# EAGLE board reciever_new (EAGLE 9.6.2)
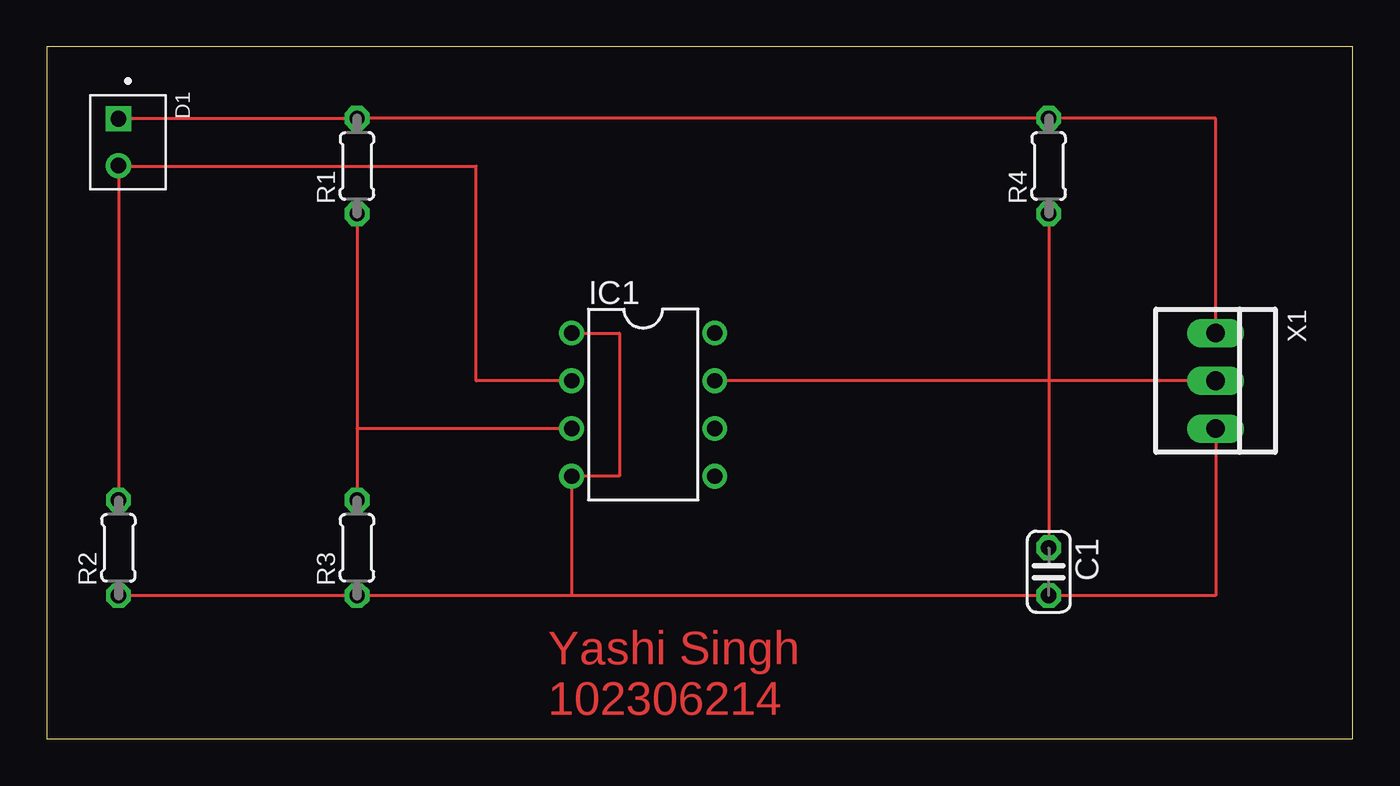
[diagram p0: board, top side]
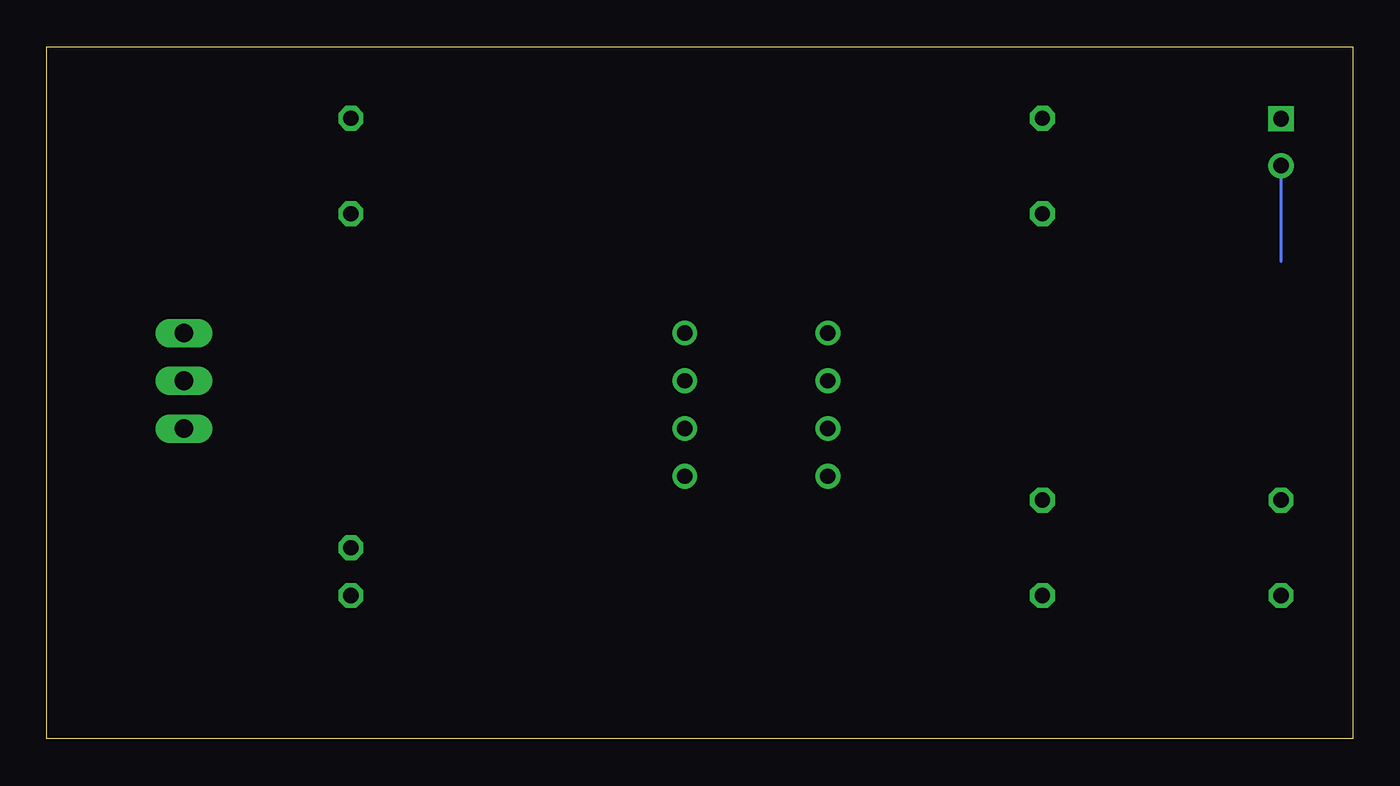
[diagram p1: board, bottom side, seen from below]

Size 69.52 x 36.82 mm. Coordinates in mm from the lower left corner, seen from the top.
Outline: 0,0 69.52,0 69.52,36.82 0,36.82 0,0
Copper layers (1*16): Top 0.035mm / dielectric 1.5mm / Bottom 0.035mm
Design rules "default": minimum track width 6mil, minimum drill 0.35mm, track to track 6mil, track to pad 6mil, pad to pad 6mil, via to via 6mil, smd to smd 6mil, copper to edge 40mil, drill to drill 6mil, minimum pad ring 10mil, minimum via ring 8mil, stop-mask expansion 4mil, vias tented up to drill 0mil, thermal gap 10mil

## Footprints (pad centres in the part's own frame; a part is rotated, then mirrored left to right if it is on the bottom)
C025-024X044 = drill 0.813 octagon: 1 -1.27,0; 2 1.27,0
DIO_BPW41N = drill 0.83 pad 1.25: A 1.25,0 | drill 0.83 pad 1.25 square: C -1.25,0
DIL08 = drill 0.813 pad 1.27: 1 -3.81,-3.81; 2 -1.27,-3.81; 3 1.27,-3.81; 4 3.81,-3.81; 5 3.81,3.81; 6 1.27,3.81; 7 -1.27,3.81; 8 -3.81,3.81
0204/5 = drill 0.813 octagon: 1 -2.54,0; 2 2.54,0
22-23-2031 = drill 1 long: 1 -2.54,0; 2 0,0; 3 2.54,0

## Placement (x,y rotation side)
C1  [C025-024X044]  53.34,8.89 270 top
D1  BPW41N  [DIO_BPW41N]  3.81,31.75 270 top
IC1  LM311N  [DIL08]  31.75,17.78 270 top
R1  100k  [0204/5]  16.51,30.48 90 top
R2  120K  [0204/5]  3.81,10.16 90 top
R3  22k  [0204/5]  16.51,10.16 90 top
R4  1k  [0204/5]  53.34,30.48 90 top
X1  22-23-2031  [22-23-2031]  62.23,19.05 270 top

## Library data of the parts
C1 = rcl; SPICEPREFIX: C
D1 = BPW41N; AVAILABILITY: In Stock; DESCRIPTION: Photodiode 940nm 130° Radial, Side View; MF: Vishay Semiconductor Opto Division; MP: BPW41N; PACKAGE: None; PRICE: None; PURCHASE-URL: https://pricing.snapeda.com/search/part/BPW41N/?ref=eda
IC1 = linear
R1-R4 = rcl; SPICEPREFIX: R
X1 = con-molex; MF: MOLEX; MPN: 22-23-2031; OC_FARNELL: 1462950; OC_NEWARK: 30C0862

## Nets
N$1: D1.A IC1.2 R2.2
N$3: C1.1 IC1.7 R4.1 X1.2
N$4: D1.C R1.2 R4.2 X1.1
N$5: IC1.3 R1.1 R3.2
N$6: C1.2 IC1.1 IC1.4 R2.1 R3.1 X1.3
V+: IC1.8

## Tracks (layer width: path | path; a pad name or v marks a point on that pad's centre or on a via)
N$1
  Top 0.152: R2.2 D1.A 3.83,30.48 22.86,30.48 22.86,19.05 IC1.2
  Bottom 0.152: D1.A 3.81,25.4
N$3
  Top 0.152: X1.2 53.34,19.05 | 53.34,19.05 IC1.7 | 53.34,19.05 C1.1 | R4.1 53.34,19.05
N$4
  Top 0.152: X1.1 62.23,33.02 R4.2 R1.2 16.49,33 D1.C
N$5
  Top 0.152: IC1.3 16.51,16.51 | R1.1 16.51,16.51 | 16.51,16.51 R3.2
N$6
  Top 0.152: X1.3 62.23,7.62 C1.2 27.94,7.62 | R2.1 R3.1 27.94,7.62 | 27.94,7.62 IC1.4 30.48,13.97 30.48,21.59 IC1.1

## Text on the board
Top: Yashi Singh / 102306214